# Altium PCB W040 24011506-06PBS PCB.PcbDoc (part 2 of 3)
Units mil, origin at the board's own origin, x right, y up, seen from the top; angles counter-clockwise.
Board outline 4320.55 x 590.55 mil, 4 copper layers (Top Layer, MidLayer1, MidLayer2, Bottom Layer); 218 components, 121 nets, 685 pads, 487 vias.
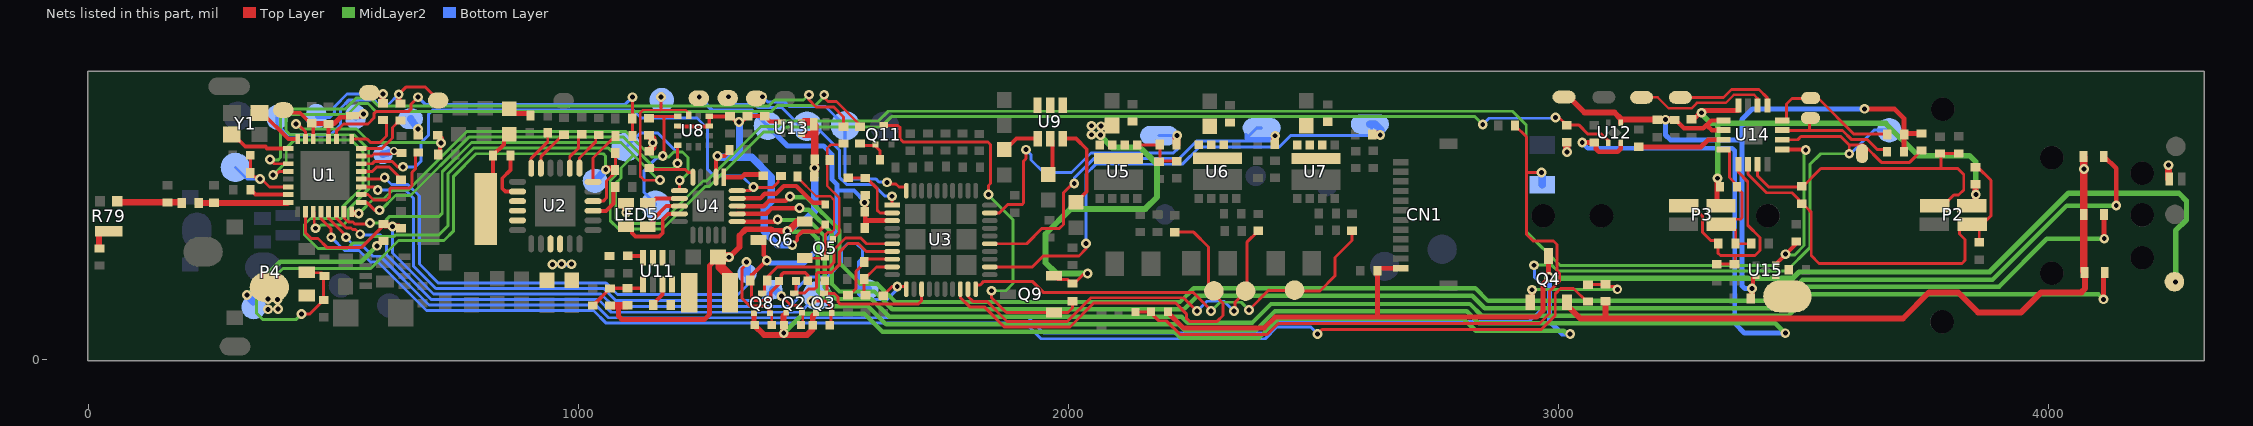
[diagram p4: the nets of this part, all layers, seen from the top]

## Via types
v1: diameter 20, hole 10, Top Layer to Bottom Layer, tented both sides, 484 vias
v2: diameter 16, hole 8, Top Layer to Bottom Layer, tented both sides, 1 vias
v3: diameter 16, hole 10, Top Layer to Bottom Layer, tented both sides, 1 vias
v4: diameter 18, hole 8, Top Layer to Bottom Layer, tented both sides, 1 vias

## Nets (pads, with @x,y where several pads share a name; then routed paths per layer and width w, separated by ;. In a path a pad name is that pad's centre, name@x,y a point inside that pad or via, vN(x,y) a via of type N, cw(c..) or ccw(c..) an arc to the next point about the centre after c; other vN are vias at no path point) (continued)
NetC33_1: C33.1 U14.3 | length 178.9
  Top Layer w10: C33.1@3164.43,435.05 3291.52,435.05 3305.9,449.43 U14.3@3337.35,449.43
NetC36_2: C36.2 P2.3 P3.3 R6.1 R11.1 U14.16 | length 1001.4
  Top Layer w10: C36.2@3271.93,490.05 3275.27,490.05 3294.02,508.8 3366.52,508.8 U14.16@3366.93,509.22 ; v1(3325.27,370.88) 3324.43,370.05 3324.43,322.55 P3.3@3332.35,314.63 ; R6.1@3330.27,353.38 3330.68,352.97 R6.1@3332.77,352.97 ; U14.16@3367.77,510.05 U14.16@3367.77,519.22
  Top Layer w12: P2.3@3844.43,314.63 3851.93,322.13 3851.93,338.38 R11.1@3851.93,358.8
  MidLayer2 w11: v1(3292.35,504.63) 3292.35,502.13 3311.52,482.97 3668.18,482.97 3734.02,417.13 3839.43,417.13 3852.35,404.22 v1(3852.35,337.97) ; v1(3325.27,370.88) 3325.27,480.47 3325.68,480.88
NetC38_1: C38.1 R75.2 | length 43
  Top Layer w10: R75.2@859.02,512.55 868.18,503.38 C38.1@898.18,503.38
NetC41_2: C41.2 C42.1 C60.1 P4.2 pad.@1034.02,365.47 R44.1 U2.4 | length 1392.2
  Top Layer w6: v1(435.27,93.8) 451.93,93.8 479.85,121.72 479.85,173.8 475.68,177.97 P4.2@445.68,177.97 ; U2.4@1030.27,324.11 1050.99,324.11 1057.77,330.88 1057.77,365.31 1075.68,383.23 1075.68,388.38 R44.1@1075.68,422.55
  Top Layer w12: v1(1056.1,388.38) 1058.6,390.88 1073.18,390.88 C60.1@1075.68,388.38
  MidLayer2 w6: v1(435.27,93.8) 424.43,82.97 355.27,82.97 343.6,94.63 343.6,133.38 397.14,186.93 576.26,186.93 633.18,243.85 725.94,243.85 745.68,263.59 745.68,375.05 791.52,420.88 1050.89,420.88 1055.47,416.3 v1@1055.47,389.01
  Bottom Layer w15: pad.@1034.02,365.47 v1(1056.1,388.38)
NetC45_2: C45.2 C46.2 pad.@300.27,392.97 U1.22 | length 184.4
  Top Layer w6: C45.2@331.1,416.72 331.1,380.88 338.18,373.8 349.02,373.8 353.6,369.22 369.6,353.21 U1.22@408.36,353.21
  Bottom Layer w6: pad.@300.27,392.97 324.02,369.22 v1(350.27,369.22)
NetC47_2: C47.2 U1.23 | length 81.4
  Top Layer w8: C47.2@331.1,347.55 341.19,337.46 U1.23@408.36,337.46
NetC48_1: C48.1 R58.2 U1.24 | length 181.4
  Top Layer w12: R58.2@225.27,320.05 U1.24@406.7,320.05
NetC49_1: C49.1 R58.1 R79.2 | length 131.2
  Top Layer w13: R79.2@58.81,324.22 61.31,321.72 R58.1@189.02,321.72
NetC50_2: C50.2 R32.2 U3.2 | length 146.1
  Top Layer w6: C50.2@1549.85,371.72 1585.27,371.72 1587.77,371.72 1610.27,349.22 1610.27,305.47 1615.6,300.14 U3.2@1640.68,300.14
NetC53_2: C53.2 R52.2 U3.8 | length 141
  Top Layer w6: C53.2@1550.68,132.13 1552.77,132.13 1566.62,145.99 1566.62,180.99 1591.28,205.65 U3.8@1640.68,205.65
NetC54_2: C54.2 R53.2 U3.9 | length 101.3
  Top Layer w6: C54.2@1586.1,132.13 1583.6,134.63 R53.2@1583.6,165.05 1608.45,189.9 U3.9@1640.68,189.9
NetC57_2: C57.2 U11.4 | length 33
  Top Layer w8: C57.2@1101.1,212.55 1128.5,212.55 U11.4@1132.46,208.59
NetC58_1: C58.1 U11.7 | length 49.6
  Top Layer w8: C58.1@1153.18,112.13 1153.18,115.05 1171.83,133.7 U11.7@1171.83,154.01
NetC58_2: C58.2 L4.1 U11.8
NetC59_1: C59.1 L1.2 R75.1 U2.15 U2.16 U2.17 | length 102.3
  Top Layer w8: L1.2@826.1,371.8 826.1,417.97 848.18,440.05 848.18,449.63 R75.1@859.02,460.47
NetC59_2: C59.2 U2.14 | length 108.2
  Top Layer w8: C59.2@861.52,417.55 861.52,387.55 844.85,370.88 844.85,350.05 851.11,343.79 U2.14@876.01,343.79
NetC61_2: C61.2 R16.2 R21.1 U5.1 | length 117
  Top Layer w6: U5.1@2141.1,438.8 2185.27,438.8 2186.93,437.13 C61.2@2186.93,406.3 ; R16.2@2221.52,405.47 2220.68,406.3 C61.2@2186.93,406.3 ; C61.2@2186.93,406.3 C61.2@2185.27,404.63 C61.2@2186.93,406.3
NetC63_1: C63.1 C65.2 P3.2 R5.2 U14.5 | length 481.6
  Top Layer w6: P3.2@3256.1,314.63 3273.18,314.63 3294.43,293.38 3294.43,260.47 3310.68,244.22 3321.93,244.22 3326.52,239.63 3326.52,217.55 3331.1,212.97 3401.52,212.97 3411.93,223.38 3411.93,250.05 3386.93,275.05 3386.93,363.8 3367.77,382.97 U14.5@3367.77,399.33 ; C65.2@3323.6,195.47 R5.2@3359.85,195.47 3360.68,196.3 3360.68,211.72
NetC63_2: C63.2 C64.1 P3.4 R6.2 U14.4 | length 301.6
  Top Layer w6: U14.4@3337.35,429.74 3345.99,429.74 3349.43,426.3 3349.43,372.13 3364.85,356.72 3364.85,351.72 3375.27,341.3 3375.27,290.47 3371.93,287.13 3342.77,287.13 P3.4@3332.77,277.13 3350.68,277.13 3362.35,265.47 3362.35,237.97 3363.18,237.13 C64.1@3393.6,237.13
NetC66_1: C66.1 P11.1 U15.3
NetC68_1: C68.1 C69.2 P2.4 R11.2 U14.6 | length 892.8
  Top Layer w6: U14.6@3387.45,399.33 3387.45,379.12 3425.27,341.3 3477.35,341.3 3490.68,327.97 3490.68,327.13 3507.77,310.05 3516.52,301.3 3516.52,212.97 3532.35,197.13 3824.02,197.13 3830.27,203.38 3830.27,245.88 3819.02,257.13 3819.02,272.13 3824.02,277.13 3866.1,277.13 3883.18,294.22 3883.18,366.72 3856.52,393.38 R11.2@3851.93,393.38 ; P2.4@3858.18,277.55 3859.43,276.3 C69.2@3859.43,240.05
NetC68_2: C68.2 C70.1 P2.2 R10.1 U14.7 | length 649
  Top Layer w6: U14.7@3407.14,399.33 3407.14,375.26 3429.64,352.76 3494.22,352.76 3494.85,352.13 3497.35,352.13 3536.1,390.88 3815.68,390.88 3827.77,378.8 3827.77,347.13 3817.04,336.4 3807.45,336.4 3785.68,314.63 P2.2@3768.18,314.63 ; 3781.1,391.3 3781.1,392.55 3781.52,392.97 3781.52,419.22 R10.1@3779.43,421.3 C70.1@3817.35,421.3
NetC72_2: C72.2 U1.5 | length 97
  Top Layer w6: U1.5@556.93,384.71 579.51,384.71 588.96,394.16 613.65,394.16 638.18,369.63 C72.2@638.18,367.97
NetL01_1: L01.1 R70.1 U3.20 | length 920.8
  Top Layer w6: U3.20@1811.17,144.63 1811.17,151.78 1812.35,152.97 1820.27,152.97 1827.77,160.47 1926.52,160.47 1948.96,138.02 2254.8,138.02 2291.52,101.3 v1(2291.52,99.63) ; v1(2369.02,102.13) 2409.43,142.55 2410.27,141.72 2461.1,141.72 2461.93,140.88 2513.6,140.88 2544.43,171.72 2544.43,209.22 2579.02,243.8 R70.1@2579.02,263.8
  MidLayer2 w6: v1(2291.52,99.63) 2309.69,117.81 2353.34,117.81 v1(2369.02,102.13)
NetL02_1: L02.1 R68.1 U3.19 | length 811.4
  Top Layer w6: U3.19@1795.42,144.63 1795.42,129.48 1805.27,119.63 1834.12,119.63 1875.16,78.59 1998.18,78.59 2046.61,127.02 2235.38,127.02 v1(2262.77,99.63) ; v1(2338.18,99.63) 2340.27,101.72 2340.27,117.97 2361.93,139.63 L02.1@2361.93,140.47 2364.43,142.97 2364.43,240.05 R68.1@2387.77,263.38
  Bottom Layer w6: v1(2262.77,99.63) 2282.97,119.84 2317.97,119.84 v1(2338.18,99.63)
NetL03_1: L03.1 R14.1 U3.18 | length 857.7
  Top Layer w6: U3.18@1779.67,144.63 1779.67,127.73 1799.02,108.38 1828.6,108.38 1869.43,67.55 2003.39,67.55 2051.86,116.02 2219.3,116.02 2241.1,94.22 2241.1,85.05 2247.35,78.8 2304.02,78.8 2316.1,90.88 2316.1,115.88 2286.52,145.47 2286.52,230.47 2256.1,260.88 R14.1@2217.35,260.88
NetLED1_2: LED1.2 U4.17 | length 3071.1
  Top Layer w9: U4.17@1324.43,298.22 1383.44,298.22 1395.27,310.05 v1(1451.52,310.05)
  Top Layer w10: v1@4114.02,247.97 LED1.2@4114.02,296.72
  MidLayer2 w9: v1(1451.52,310.05) 1455.06,306.51 1470.27,306.51 1517.77,259.01 1517.77,155.05 1533.08,139.74 1604.43,139.74 1640.79,103.38 2236.1,103.38 2263.81,131.09 2824.64,131.09 2850.27,105.47 3461.52,105.47 3505.68,149.63 3899.85,149.63 3997.35,247.13 4114.02,247.13 v1(4114.43,247.55)
NetLED2_2: LED2.2 U4.18 | length 3165
  Top Layer w9: U4.18@1324.43,313.97 1378.77,313.97 1389.43,324.63 1423.6,324.63 v1(1432.35,333.38)
  Top Layer w10: LED2.2@4113.6,415.05 4114.85,415.05 4139.02,390.88 v1(4139.02,315.05)
  MidLayer2 w9: v1(1432.35,333.38) 1434.02,331.72 1466.52,331.72 1533.18,265.05 1533.18,198.12 1576.05,155.26 1610.37,155.26 1647.25,118.38 2228.18,118.38 2256.1,146.3 2831.1,146.3 2856.93,120.47 3455.27,120.47 3498.55,163.75 3886.46,163.75 4037.77,315.05 v1(4139.02,315.05)
NetLED3_2: LED3.2 U4.16 | length 3042.6
  Top Layer w9: U4.16@1324.43,282.47 1402.69,282.47 v1(1406.93,286.72)
  Top Layer w10: v1(4112.77,123.8) 4112.77,175.47 LED3.2@4115.68,178.38
  MidLayer2 w9: v1(1406.93,286.72) 1407.97,285.68 1470.06,285.68 1502.77,252.97 1502.77,148.38 1526.67,124.48 1598.03,124.48 1634.54,87.97 2231.31,87.97 2243.6,75.68 2375.27,75.68 2413.81,114.22 2819.85,114.22 2843.81,90.26 3469.95,90.26 3513.5,133.8 4102.77,133.8 v1(4112.77,123.8)
NetLED4_2: LED4.2 U4.19 | length 206
  Top Layer w9: U4.19@1324.43,329.72 1371.19,329.72 1380.68,339.22 1403.6,339.22 1419.43,355.05 1444.85,355.05 1479.43,320.47 1501.52,320.47 LED4.2@1504.43,317.55
NetLED5_1: LED5.1 U4.8 | length 84.9
  Top Layer w8: LED5.1@1141.52,271.72 1153.18,283.38 1153.18,287.55 1179.6,313.97 U4.8@1206.44,313.97
NetLED5_2: LED5.2 U4.7 | length 68.9
  Top Layer w8: LED5.2@1141.52,320.05 1148.6,320.05 1158.27,329.72 U4.7@1206.44,329.72
NetLED5_4: LED5.4 U4.9 | length 157.8
  Top Layer w8: LED5.4@1097.35,271.72 1104.02,271.72 1109.43,266.3 1109.43,258.8 1116.41,251.82 1164.95,251.82 1172.35,259.22 1172.35,287.97 1182.61,298.22 U4.9@1206.44,298.22
NetP5_1: P5.1 pad.@465.27,497.13 R61.2 | length 211.7
  Top Layer w12: P5.1@573.6,545.05 576.1,542.55 v1(601.52,542.55) 600.68,541.72 R61.2@600.68,524.22
  Bottom Layer w6: pad.@465.27,497.13 467.35,495.05 493.18,495.05 502.77,504.63 502.77,517.13 528.18,542.55 v1(601.52,542.55)
NetP6_1: P6.1 pad.@385.27,495.47 R62.2 | length 452.4
  Top Layer w6: v1(633.6,542.13) 649.02,557.55 687.35,557.55 714.02,530.88 P6.1@714.02,529.63
  Top Layer w12: v1(633.6,542.13) 633.6,526.72 R62.2@636.93,523.38
  Bottom Layer w6: pad.@385.27,495.47 385.27,481.72 407.77,459.22 494.02,459.22 514.75,479.95 514.75,513.28 532.35,530.88 582.77,530.88 592.35,521.3 612.77,521.3 v1(633.6,542.13)
NetP9_1: P9.1 U14.14 | length 275.6
  Top Layer w5: P9.1@3170.27,535.88 3203.18,535.88 3225.68,513.38 3271.93,513.38 3283.18,524.63 3342.04,524.63 3358.7,541.3 3399.85,541.3 3407.14,534.01 U14.14@3407.14,519.22
NetP10_1: P10.1 U14.13 | length 206.9
  Top Layer w6: P10.1@3249.43,535.88 3337.45,535.88 3353.5,551.93 3409.95,551.93 3426.82,535.06 U14.13@3426.82,519.22
NetP15_1: P15.1 pad.@1466.93,477.13 U3.1 | length 468.5
  Top Layer w6: v1(1640.27,334.22) 1640.27,316.3 U3.1@1640.68,315.88
  Bottom Layer w6: v1(1306.93,537.13) 1322.56,521.51 1360.32,521.51 1366.46,515.36 1415.37,515.36 1453.6,477.13 1484.43,477.13 1532.77,428.8 1532.77,373.07 1547.77,358.07 1602.04,358.07 1625.89,334.22 v1(1640.27,334.22)
NetP16_1: P16.1 pad.@1545.27,477.97 U3.40 | length 435
  Top Layer w6: v1(1629.85,362.55) 1633.18,359.22 1648.18,359.22 1654.43,352.97 1668.6,352.97 1669.43,352.13 U3.40@1669.43,345.4
  Bottom Layer w6: v1(1375.68,537.13) 1386,526.82 1420.58,526.82 1430.27,517.13 1504.85,517.13 1544.02,477.97 1544.02,379.22 1553.6,369.63 1606.93,369.63 1613.5,363.07 1629.33,363.07 v1(1629.85,362.55)
NetQ2_3: Q2.3 R50.2 U3.7 | length 306
  Top Layer w6: R50.2@1444.43,161.3 1444.43,139.63 1441.1,136.3 1461.93,136.3 1470.27,144.63 1482.35,144.63 1486.1,148.38 1486.1,176.3 1488.03,178.23 1516.78,178.23 1532.87,194.32 1532.87,220.05 1550.37,237.55 1571.52,237.55 1587.67,221.4 U3.7@1640.68,221.4
NetQ3_3: Q3.3 R51.2 U3.13 | length 270.9
  Top Layer w6: R51.2@1503.18,161.72 1507.35,157.55 1507.35,141.3 Q3.3@1501.52,135.47 1522.77,135.47 1529.85,128.38 1529.85,118.8 1534.85,113.8 1693.6,113.8 1700.93,121.13 U3.13@1700.93,144.63
NetQ4_1: Q4.1 R3.2 R4.2 | length 263.7
  Top Layer w6: R3.2@3061.1,153.8 3096.1,153.8 3099.85,150.05 3114.85,150.05 v1(3120.68,144.22)
  Top Layer w10: Q4.1@2943.18,117.97 2946.52,121.3 v1(2946.52,143.38)
  MidLayer2 w6: v1(2946.52,143.38) v1@3119.85,143.38
NetQ5_1: Q5.1 R29.1 R31.1 | length 240.1
  Top Layer w5: Q5.1@1519.85,247.13 1532.97,260.26 1532.97,330.47 1508.18,355.26 1508.18,432.13 1514.85,438.8 R29.1@1538.6,438.8
  Top Layer w6: R31.1@1507.77,408.8 1508.6,407.97 R31.1@1513.6,407.97
NetQ5_3: Q5.3 Q6.1 R48.1 | length 269
  Top Layer w5: R48.1@1447.35,374.63 1447.35,372.55 1485.68,334.22 1514.43,334.22 1521.93,326.72 1521.93,265.47 1517.04,260.57 1508.7,260.57 1504.43,256.3 1504.43,207.97 Q6.1@1461.93,207.97
NetQ8_3: Q8.3 R49.2 U3.6 | length 346
  Top Layer w6: Q8.3@1375.27,135.47 1380.27,140.47 1380.27,163.8 1406.2,189.74 1512.04,189.74 1521.72,199.43 1521.72,225.26 1545.27,248.8 1576.52,248.8 1588.17,237.14 U3.6@1640.68,237.14
NetQ9_1: Q9.1 Q11.3 R22.1 | length 813.8
  Top Layer w6: Q11.3@1623.18,479.63 1624.43,478.38 1652.77,478.38 1656.93,474.22 1656.93,450.88 1663.18,444.63 1836.1,444.63 1841.52,439.22 1841.52,360.05 1837.35,355.88 v1(1837.35,337.97) ; v1(1843.6,141.3) 1843.6,126.82 1873.7,96.72 1999.43,96.72 2008.6,105.88 R22.1@2008.6,119.63
  MidLayer2 w6: v1(1837.35,337.97) 1837.35,336.3 1887.35,286.3 1887.35,155.88 1872.77,141.3 v1(1843.6,141.3)
NetQ11_1: Q11.1 R28.1 R30.2 | length 69.7
  Top Layer w6: R28.1@1574.85,441.72 1579.02,437.55 1604.43,437.55 Q11.1@1606.93,440.05 1606.93,435.88 1615.68,427.13 R30.2@1615.68,408.8
NetR2_2: R2.2 R12.2 R13.1 R80.1 | length 1392.6
  Top Layer w6: R12.2@2137.35,97.97 2168.6,97.97 2168.6,96.3 2184.85,80.05 2200.27,80.05 2228.6,51.72 2406,51.72 2428.5,74.22 2961.72,74.22 2982.35,94.84 2982.35,140.47 3003.18,161.3 3003.18,176.72 2997.35,182.55 2997.35,235.47 2990.27,242.55 2949.02,242.55 2935.27,256.3 2935.27,455.47 R2.2@2911.93,478.8 ; 2936.52,382.55 v1(2965.68,382.55)
  Bottom Layer w15: v1(2965.68,382.55) 2967.77,380.47 R80.1@2967.77,357.55
NetR7_1: R7.1 SDA.1 U14.12 | length 279.8
  Top Layer w6: U14.12@3457.24,488.8 3463.18,488.8 3466.1,491.72 3466.1,522.13 3477.35,533.38 3514.02,533.38 3531.1,533.38 3603.6,460.88 R7.1@3670.68,460.88
NetR8_1: R8.1 SCL.1 U14.11 | length 255.5
  Top Layer w6: U14.11@3457.97,468.38 3580.27,468.38 3599.07,449.58 3631.1,449.58 3651.46,429.22 3666.93,429.22 R8.1@3671.1,425.05 ; 3513.18,470.05 3513.18,492.13 SCL.1@3514.85,493.8
NetR19_2: pad.@2615.68,481.3 R19.2 U3.22 | length 1058.1
  Top Layer w6: U3.22@1839.92,189.9 1926.78,189.9 1949.02,212.13 2021.83,212.13 2036.52,226.82 v1(2036.52,237.97)
  Top Layer w16: R19.2@2620.68,460.05 2636.1,460.05 v1(2636.93,459.22)
  Bottom Layer w6: v1(2036.52,237.97) 2036.52,379.63 2056.31,399.43 2232.56,399.43 2267.77,434.63 2430.68,434.63 2454.02,457.97 2619.43,457.97 2619.43,477.55 pad.@2615.68,481.3
  Bottom Layer w15: pad.@2615.68,481.3 2626.52,481.3 2638.18,469.63 v1@2638.18,460.47
NetR20_2: pad.@2394.85,473.8 R20.2 U3.25 | length 846
  Top Layer w6: U3.25@1839.92,237.14 1915.28,237.14 1946.72,268.59 1982.14,268.59 1990.27,276.72 1990.27,341.3 2009.02,360.05 v1(2012.35,360.05)
  Top Layer w16: R20.2@2421.52,440.47 v1@2421.52,456.72
  Bottom Layer w6: v1(2012.35,360.05) 2012.35,371.3 2051.93,410.88 2226.1,410.88 2262.35,447.13 2411.93,447.13 v1(2422.35,457.55) 2416.93,452.13 2362.97,452.13 2362.77,452.34 2362.77,460.68 2367.35,456.09 2385.06,473.8 pad.@2394.85,473.8
NetR21_2: pad.@2185.68,457.97 R21.2 U3.29 | length 624.4
  Top Layer w6: U3.29@1839.92,300.14 1859.21,300.14 1876.62,317.55 1906.2,317.55 1908.91,320.26 1908.91,405.78 1914.02,410.88 v1(1914.02,429.22)
  Top Layer w16: R21.2@2221.1,440.05 v1@2221.1,456.72
  Bottom Layer w6: v1(1914.02,429.22) 1914.02,429.01 1924.02,419.01 1924.02,408.38 1949.85,382.55 2006.93,382.55 2046.52,422.13 2214.43,422.13 2223.6,431.3 2223.6,456.72 v1(2222.35,457.97) pad.@2185.68,457.97
NetR33_1: R33.1 R34.2 R35.2 U11.5 | length 125.2
  Top Layer w8: R33.1@1029.43,111.3 1030.27,111.3 1065.27,146.3 1132.35,146.3 1132.46,146.41 U11.5@1132.46,154.01
NetR36_2: R36.2 U2.12 | length 86.4
  Top Layer w6: U2.12@903.92,391.39 903.92,411.62 937.77,445.47 R36.2@937.77,463.8
NetR37_1: R37.1 U2.11 | length 89.4
  Top Layer w6: U2.11@923.61,391.39 923.61,414.64 968.6,459.63 R37.1@971.1,459.63
NetR38_1: R38.1 U2.8 | length 79.1
  Top Layer w6: U2.8@982.67,391.39 982.67,414.53 1000.27,432.13 1000.27,453.8 R38.1@1006.93,460.47
NetR39_1: R39.1 U2.7 | length 84.2
  Top Layer w6: U2.7@1002.35,391.39 1002.35,412.13 1035.68,445.47 1035.68,452.97 R39.1@1041.93,459.22
NetR43_1: R43.1 U2.6 | length 112.3
  Top Layer w6: U2.6@1030.27,363.48 1030.27,412.13 R43.1@1075.27,457.13
NetR45_1: R45.1 U2.3 | length 82.9
  Top Layer w8: U2.3@1030.27,304.42 1056.72,304.42 1071.52,319.22 1071.52,348.8 R45.1@1075.68,352.97
NetR46_1: R46.1 U4.1 | length 83.5
  Top Layer w10: U4.1@1296.93,372.97 1333.6,372.97 1339.02,378.38 1375.27,378.38 R46.1@1377.35,376.3
NetR57_2: R57.2 R79.1 | length 52.5
  Top Layer w13: R57.2@21.93,228.38 21.93,260.05 24.85,262.97 R79.1@41.52,262.97
NetR61_1: R61.1 U1.9 | length 115.2
  Top Layer w6: U1.9@537.77,451.12 569.2,451.12 576.52,443.8 595.27,443.8 608.6,457.13 608.6,481.72 R61.1@600.68,489.63
NetR62_1: R62.1 U1.8 | length 116.2
  Top Layer w6: U1.8@556.93,431.95 599.67,431.95 620.68,452.97 620.68,474.63 634.85,488.8 R62.1@636.93,488.8
NetR63_1: pad.@601.1,419.63 R63.1 U1.7 | length 112.6
  Top Layer w6: U1.7@556.93,416.2 578.92,416.2 583.29,420.57 617.87,420.57 v3(624.02,426.72)
  Top Layer w12: v3(624.02,426.72) 626.52,424.22 637.77,424.22 R63.1@639.43,422.55
  Bottom Layer w15: pad.@601.1,419.63 v3(624.02,426.72)
NetR64_1: R64.1 U1.2 | length 202.5
  Top Layer w6: U1.2@556.93,337.46 570.77,337.46 581.93,326.3 600.68,326.3 608.6,326.3 615.27,332.97 615.27,348.8 617.77,351.3 655.68,351.3 660.68,356.3 660.68,382.97 667.35,389.63 667.35,417.13 R64.1@673.6,423.38
NetR64_2: pad.@657.77,492.13 R64.2 | length 39.4
  Top Layer w12: v1(673.18,471.3) 673.6,470.88 R64.2@673.6,457.97
  Bottom Layer w15: pad.@657.77,492.13 v1(673.18,471.3)
NetR71_2: R71.2 U9.6 | length 175.3
  Top Layer w8: U9.6@1988.95,451.72 2016.1,451.72 2037.77,430.05 2037.77,343.8 R71.2@2015.68,321.72
NetR72_2: R72.2 U9.5 | length 79
  Top Layer w8: R72.2@1959.43,378.38 1968.18,387.13 1968.18,446.89 U9.5@1963.36,451.72
NetR73_2: R73.2 U9.4 | length 77.5
  Top Layer w8: R73.2@1869.43,429.63 1871.93,429.63 1894.02,451.72 U9.4@1937.77,451.72
NetU1_16: U1.16 Y1.4 | length 99.7
  Top Layer w8: Y1.4@349.43,503.38 356.1,503.38 408.36,451.12 U1.16@427.53,451.12
NetU1_17: U1.17 Y1.2 | length 126.9
  Top Layer w8: Y1.2@292.77,459.22 296.52,459.22 320.37,435.36 361.62,435.36 365.03,431.95 U1.17@408.36,431.95
U1-1: pad.@1097.77,434.63 R41.1 U1.1 U4.5 U8.4 | length 1043.7
  Top Layer w6: U1.1@556.93,321.72 568.18,321.72 584.43,305.47 v1(594.02,305.47) ; R41.1@1144.02,391.72 1147.35,388.38 1218.6,388.38 1224.43,382.55 1235.27,382.55 1233.94,381.22 U4.5@1233.94,372.97 ; v1(1202.77,401.3) U8.4@1202.77,438.08
  MidLayer2 w6: v1(594.02,305.47) 596.72,305.47 627.14,335.88 657.77,335.88 776.62,454.74 1092.25,454.74 1155.89,391.09 1195.06,391.09 1202.77,398.8 v1(1202.77,401.3)
  Bottom Layer w6: pad.@1097.77,434.63 1126.52,463.38 1162.35,463.38 1202.77,422.97 v1(1202.77,401.3)
U1-3: pad.@1396.93,143.38 Q2.2 R55.2 U1.3 | length 1137.9
  Top Layer w6: U1.3@556.93,353.21 584.19,353.21 v1(590.68,346.72) ; v1(1414.43,130.47) 1434.02,110.88 1450.68,110.88 1454.02,107.55 1454.02,102.13 1458.18,97.97 1458.18,75.05 R55.2@1454.43,71.3
  Bottom Layer w6: v1(590.68,346.72) 646.93,346.72 664.02,329.63 664.02,190.88 709.22,145.68 1052.14,145.68 1076.52,121.3 1373.18,121.3 1395.27,143.38 pad.@1396.93,143.38
  Bottom Layer w16: pad.@1396.93,143.38 1401.52,143.38 v1(1414.43,130.47)
U1-4: pad.@1344.43,176.72 Q8.2 R54.2 U1.4 | length 1198.8
  Top Layer w6: U1.4@556.93,368.96 601.68,368.96 v1(604.85,372.13) ; v1(1343.18,200.05) 1343.18,195.05 1334.43,186.3 1334.43,125.88 1350.48,109.84 1381.73,109.84 1391.1,100.47 1391.1,95.88 1394.85,92.13 R54.2@1394.85,71.3
  Bottom Layer w6: v1(604.85,372.13) 618.6,358.38 651.93,358.38 675.68,334.63 675.68,195.78 714.75,156.72 1056.93,156.72 1079.85,133.8 1326.1,133.8 1344.43,152.13 pad.@1344.43,176.72
  Bottom Layer w16: pad.@1344.43,176.72 v1@1344.43,198.8
U1-6: R47.1 U1.6 U4.20 | length 1124.9
  Top Layer w6: U1.6@556.93,400.46 579.42,400.46 584.43,405.47 619.85,405.47 631.1,394.22 v1(642.35,394.22) ; U4.20@1324.43,345.47 1350.27,345.47 v1(1357.77,352.97) 1359.02,351.72 1396.93,351.72 1408.18,362.97 1408.18,372.13 1410.27,372.13 R47.1@1413.6,375.47
  Bottom Layer w6: v1(642.35,394.22) 667.77,394.22 679.43,405.88 679.43,443.8 694.02,458.38 694.02,500.88 702.77,509.63 703.6,510.47 1111.52,510.47 1128.18,493.8 1242.35,493.8 1263.6,472.55 1263.6,389.22 1277.77,375.05 1334.43,375.05 1356.52,352.97 v1(1357.77,352.97)
U1-11: R42.2 R43.2 U1.11 | length 751
  Top Layer w6: U1.11@506.27,451.12 506.27,466.89 521.1,481.72 570.79,481.72 582.77,493.7 582.77,502.55 586.93,506.72 653.18,506.72 658.18,511.72 658.18,521.3 v1(673.18,536.3) ; R43.2@1110.68,457.13 v1(1110.68,536.3)
  Bottom Layer w6: v1(673.18,536.3) 687.77,521.72 1096.1,521.72 v1(1110.68,536.3)
U1-15: R65.1 R66.1 U1.15 | length 397.2
  Top Layer w6: v1(423.6,481.72) 427.35,481.72 443.28,465.79 U1.15@443.28,451.12
  Top Layer w8: R66.1@714.43,419.22 717.77,422.55 717.77,440.88 v1(719.85,442.97)
  Top Layer w12: R65.1@713.18,458.8 719.85,452.13 v1(719.85,442.97)
  MidLayer2 w6: v1(423.6,481.72) 434.02,471.3 547.35,471.3 574.95,443.7 717.87,443.7 v1@719.02,442.55
U1-19: R29.2 U1.19 | length 1376.5
  Top Layer w6: v1(370.68,409.22) 379.44,400.46 U1.19@408.36,400.46 ; v1(1470.68,541.3) 1470.68,530.88 1485.47,516.09 1521.52,516.09 1541.52,496.09 R29.2@1541.52,476.3
  MidLayer2 w6: v1(370.68,409.22) 372.14,407.76 386.72,407.76 392.04,413.07 392.04,499.11 404.85,511.93 523.81,511.93 546.1,534.22 575.68,534.22 591.83,518.07 1388.7,518.07 1401.1,530.47 1459.85,530.47 v1(1470.68,541.3)
U1-20: R1.2 U1.20 U12.3 | length 3641.1
  Top Layer w6: v1(377.35,377.55) 382.35,377.55 389.51,384.71 U1.20@408.36,384.71 ; v1(2994.43,494.63) 3001.93,494.63 R1.2@3017.35,479.22 3042.77,479.22 3061.1,460.88 3088.6,460.88 3102.18,447.31 U12.3@3102.18,443.59
  MidLayer2 w6: v1(377.35,377.55) 404.02,404.22 404.02,432.13 420.48,448.59 536.93,448.59 560.68,424.84 560.68,354.22 519.22,312.76 519.22,291.51 516.31,288.59 453.39,288.59 441.2,276.4 441.2,254.95 468.6,227.55 529.02,227.55 539.8,238.33 565.84,238.33 579.75,252.24 624.33,252.24 627.56,255.47 715.47,255.47 734.43,274.43 734.43,380.47 786.2,432.24 1062.04,432.24 1075.68,418.59 1075.68,376.72 1065.27,366.3 1065.27,284.32 1082.45,267.13 1172.14,267.13 1258.6,353.59 1266.93,353.59 1378.6,465.26 1414.23,465.26 1424.85,475.88 1618.18,475.88 1638.91,496.61 2829.95,496.61 v1(2846.1,480.47)
  Bottom Layer w6: v1(2846.1,480.47) 2859.02,493.38 2993.18,493.38 v1(2994.43,494.63)
U1-26: C55.2 pad.@1591.93,143.8 R59.2 R60.1 U1.26 U3.11 | length 1692.4
  Top Layer w6: U1.26@443.28,302.55 443.28,259.54 454.85,247.97 469.02,247.97 487.77,229.22 556.93,229.22 602.77,275.05 R59.2@602.77,277.55 ; C55.2@1622.35,131.3 1622.35,131.72 1640.68,150.05 1666.93,150.05 1669.43,152.55 U3.11@1669.43,144.63
  Top Layer w12: R59.2@602.77,277.55 606.1,274.22 619.02,274.22 v1(620.68,272.55) 634.43,272.55 R60.1@638.18,268.8
  Bottom Layer w6: v1(620.68,272.55) 620.68,218.38 704.54,134.53 1046.62,134.53 1072.35,108.8 1430.68,108.8 1446.93,125.05 1446.93,147.13 1469.1,169.3 1503.09,169.3 1503.38,169.01 1508.39,169.01 1537.35,197.97 1537.35,225.05 1549.43,237.13 1568.6,237.13 1579.85,225.88 1579.85,208.38 1572.35,200.88 1572.35,133.8 1582.35,123.8 1630.68,123.8 1651.1,144.22 v1(1651.1,150.05)
  Bottom Layer w16: pad.@1577.77,142.13 1579.43,143.8 pad.@1591.93,143.8
U1-27: R28.2 U1.27 | length 1721.3
  Top Layer w6: U1.27@459.03,302.55 461.1,300.48 461.1,271.3 v1(463.6,268.8) ; v1(1501.93,541.3) 1501.93,535.47 1509.85,527.55 1526.93,527.55 1574.85,479.63 R28.2@1574.85,476.3
  MidLayer2 w6: v1(463.6,268.8) 468.39,268.8 474.64,275.05 519.85,275.05 530.47,285.67 530.47,307.34 572.35,349.22 572.35,429.74 542.45,459.63 411.52,459.63 403.39,467.76 403.39,494.63 409.64,500.88 529.02,500.88 551.31,523.18 570.68,523.18 587.04,506.82 1393.5,506.82 1406.1,519.43 1483.81,519.43 1501.93,537.55 v1(1501.93,541.3)
U1-28: R3.1 U1.28 | length 2803.3
  Top Layer w6: U1.28@474.77,302.55 474.77,288.04 495.68,267.13 v1(495.68,250.47) ; v1(2509.02,52.97) 2518.6,62.55 2966.1,62.55 2994.02,90.47 2994.02,135.05 3004.85,145.88 3031.52,145.88 3058.18,119.22 R3.1@3061.1,119.22
  Bottom Layer w6: v1(495.68,250.47) 522.77,223.38 552.35,223.38 575.68,200.05 591.31,200.05 690.47,100.88 1031.1,100.88 1056.93,75.05 1912.77,75.05 1944.54,43.28 2402.25,43.28 2426,67.03 2494.95,67.03 v1(2509.02,52.97)
U1-29: LNT.1 pad.@3675.68,469.01 R9.1 U1.29 U14.10 | length 4008.7
  Top Layer w6: U1.29@490.52,302.55 490.52,288.75 525.68,253.59 v1(525.68,250.47) ; U14.10@3457.24,449.43 3488.81,449.43 3495.27,455.88 3576.93,455.88 3593.18,439.63 ; v1(3594.02,420.88) 3594.02,438.8 3593.65,438.44 3623.91,438.44 3624.64,437.71 3625.11,437.71 3659.43,403.38 3717.35,403.38 R9.1@3741.52,427.55 ; LNT.1@3620.27,421.3 3620.27,436.72 LNT.1@3621.99,438.44
  MidLayer2 w6: v1(2950.68,193.38) 2986.93,193.38 2999.02,181.3 3466.1,181.3 3513.6,228.8 3513.6,398.8 3535.68,420.88 v1(3594.02,420.88)
  Bottom Layer w6: v1(525.68,250.47) 541.52,234.63 558.18,234.63 581.1,211.72 595.68,211.72 695.37,112.03 1035.84,112.03 1061.67,86.2 1918.7,86.2 1949.85,55.05 2398.18,55.05 2421.93,78.8 2941.1,78.8 2968.18,105.88 2968.18,152.55 2951.93,168.8 2951.93,192.13 v1(2950.68,193.38) ; v1(3594.02,420.88) 3596.52,420.88 3644.64,469.01 pad.@3675.68,469.01
U1-30: pad.@1487.35,131.3 Q3.2 R56.2 U1.30 | length 1173.7
  Top Layer w6: U1.30@506.27,302.55 506.27,289.46 526.52,269.22 536.1,269.22 539.02,266.3 545.27,266.3 v1(554.85,256.72) ; v1(1476.1,120.47) 1504.85,120.47 1517.35,107.97 Q3.2@1517.35,95.88 1515.68,94.22 1515.68,73.38 R56.2@1513.18,70.88
  Bottom Layer w6: v1(554.85,256.72) 556.52,255.05 596.1,255.05 608.91,242.24 608.91,214.32 699.9,123.33 1041.15,123.33 1067.14,97.34 1452.98,97.34 v1(1476.1,120.47)
U1-31: C67.1 pad.@1170.27,530.47 U1.31 U8.12 U14.9 U15.4 | length 4367.9
  Top Layer w5: v1(1166.52,367.13) 1134.02,367.13 1126.93,374.22 1126.93,505.05 1132.04,510.15 1219.33,510.15 1224.43,505.05 U8.12@1224.43,500.16
  Top Layer w6: U1.31@522.02,302.55 522.02,289.96 530.68,281.3 540.27,281.3 544.02,277.55 572.77,277.55 v1(574.85,279.63) ; 1167.77,510.05 1168.6,510.88 v1(1168.6,536.72)
  Top Layer w8: U15.4@3444.85,195.47 3485.68,236.3 C67.1@3485.68,241.72 ; U14.9@3457.24,429.74 v1@3504.32,429.74
  MidLayer2 w6: v1(574.85,279.63) 601.31,279.63 614.12,292.45 715.37,292.45 722.35,299.43 722.35,384.22 781.83,443.7 1087.45,443.7 1164.02,367.13 v1@1165.48,367.13 ; 1112.35,417.13 1087.14,391.92 1087.14,371.2 1076.52,360.57 1076.52,289.63 1087.77,278.38 1167.77,278.38 1254.85,365.47 1262.35,365.47 1373.18,476.3 1408.6,476.3 1419.85,487.55 1612.35,487.55 1632.45,507.65 2906.83,507.65 2934.85,479.63 2934.85,261.72 3004.02,192.55 3441.93,192.55 3463.6,214.22 3482.77,214.22 3501.93,233.38 3501.93,425.47 v1(3505.27,428.8)
  other v1: 3464.02,215.88
U1-32: pad.@1157.35,315.88 R40.2 U1.32 U4.6 U8.1 | length 1130.9
  Top Layer w6: R40.2@1144.43,493.38 1147.77,496.72 U8.1@1202.77,496.72 ; v1(1172.35,416.3) 1174.85,418.8 1174.85,495.88 ; U4.6@1206.93,345.96 v1(1206.93,366.3)
  Top Layer w12: U1.32@539.07,301.25 541.1,299.22 v1(551.93,299.22)
  MidLayer2 w6: v1@552.77,299.22 581.83,328.28 602.66,328.28 621.52,347.13 652.87,347.13 771.62,465.88 1097.56,465.88 1149.43,414.01 1184.64,414.01 1195.06,424.43 1212.77,424.43 1223.96,413.23 1223.96,381.04 1209.22,366.3 v1(1206.93,366.3)
  Bottom Layer w6: pad.@1157.35,315.88 1157.35,319.22 1134.43,342.13 1134.43,386.72 1160.27,412.55 1168.6,412.55 v1(1172.35,416.3)
VC1: C3.1 C4.1 C5.1 C9.2 C10.2 C13.1 C14.1 C56.2 C71.1 CN2.1 P4.3 pad.@337.77,107.97 Q9.2 R22.2 R59.1 U2.21 U2.22 U5.2 U5.3 U5.4 U5.9 U6.2 U6.3 U6.4 U6.9 U7.2 U7.3 U7.4 U7.9 U9.1 U9.2 U9.3 U11.2 U11.3 | length 1162.1
  Top Layer w6: Q9.2@1971.1,171.72 1978.18,164.63 1998.18,164.63 2008.6,154.22 2010.27,154.22 2032.77,176.72 v1@2039.02,176.72
  Top Layer w12: v1(589.43,232.97) 599.43,242.97 R59.1@602.77,242.97
  MidLayer2 w9: v1(323.6,132.55) 324.02,132.55 391.93,200.47 556.93,200.47 v1(589.43,232.97)
  MidLayer2 w12: v1(2039.64,176.72) 1975.27,176.72 1953.6,198.38 1953.6,257.13 2004.85,308.38 2157.35,308.38 2181.52,332.55 2181.52,399.22 2146.93,433.8 2102.35,433.8 2089.45,433.8 2065.68,457.57 v1(2065.68,459.22)
  Bottom Layer w8: v1(947.35,195.05) v1@985.68,195.05 ; v1(2047.35,459.63) 2047.77,460.05 v1(2047.77,477.97) 2066.1,477.97 2065.68,477.55 v1(2065.68,459.22) 2065.27,459.63 v1(2047.35,459.63)
  Bottom Layer w15: v1(323.6,132.55) pad.@336.52,118.8
  other v1: 366.52,103.38 387.35,103.8 386.1,123.38 366.52,124.22 986.1,195.47 966.1,195.88 2066.93,477.13
VC2: C11.2 C19.2 C32.1 L4.2 Q6.2 R34.1 R35.1 R48.2 R77.1 U12.4 U13.3 U13.4 | length 4093.4
  Top Layer w10: 1081.93,108.38 1081.93,89.63 1088.6,82.97 1257.77,82.97 1268.18,93.38 1268.18,192.9 C11.2@1285.33,210.05 ; v1(3049.02,443.8) 3077.35,443.8 3077.35,430.47 3082.77,425.05 3121.52,425.05 3127.77,431.3 U12.4@3127.77,443.59
  Top Layer w12: v1@1307.35,210.05 1308.6,210.05 1329.02,230.47 1329.02,254.22 1341.52,266.72 1393.6,266.72 1397.35,262.97 v1(1426.52,262.97)
  Top Layer w15: R34.1@1064.85,111.3 1065.68,110.47 R35.1@1099.02,110.47 ; v1(1426.52,262.97) 1428.18,262.97 1447.77,282.55 Q6.2@1461.93,282.55 ; U13.3@1461,460.29 1476.34,460.29 1479.43,463.38 ; U13.4@1461,485.88 1475.27,485.88 1482.35,478.8 1482.35,375.05 R48.2@1481.93,374.63
  Top Layer w20: v1@1307.35,210.05 C11.2@1285.33,210.05 1290.27,205.12 1290.27,189.63 1309.85,170.05 L4.2@1309.85,137.13
  MidLayer2 w9: v1@1427.77,261.72 1473.81,261.72 1488.6,246.92 1488.6,141.3 1520.68,109.22 1592.04,109.22 1628.7,72.55 2225.06,72.55 2237.35,60.26 2382.97,60.26 2421.93,99.22 2813.6,99.22 2837.77,75.05 3443.18,75.05 v1(3463.6,54.63)
  Bottom Layer w10: v1(3049.02,443.8) 3060.68,432.13 3355.27,432.13 3360.27,427.13 3360.27,74.63 3380.27,54.63 v1(3463.6,54.63)
  Bottom Layer w15: v1(1426.52,262.97) 1429.85,262.97 1450.68,283.8 1461.93,283.8 1482.77,304.63 1482.77,391.3 v1(1482.35,391.72)
  other v1: 1307.77,209.63
VC3: C15.2 C16.2 C17.2 C18.1 C43.1 C44.1 LED1.1 LED2.1 LED3.1 LED4.1 LED5.3 P18.1 pad.@545.27,496.3 Q4.2 R1.1 R4.1 R40.1 R41.2 R76.1 R78.1 U1.12 U1.14 U4.2 U8.2 U8.9 U8.10 U13.1 | length 2596.8
  Top Layer w8: P18.1@398.18,510.05 403.6,504.63 432.35,504.63 454.02,482.97 C44.1@456.1,482.97 459.03,480.04 U1.14@459.03,451.12 ; U1.12@490.52,451.12 C43.1@490.52,481.46 ; U8.2@1202.35,477.87 1203.5,476.72 1265.05,476.72 1267.35,479.01 1267.35,496.4 1267.04,496.72 1309.02,496.72 C17.2@1309.85,497.55 1311.52,497.55 1323.18,485.88 1333.6,485.88 C16.2@1345.27,497.55 1380.27,497.55 1391.52,486.3 U13.1@1414.85,486.3 ; U4.2@1281.19,372.97 1281.19,413.05 v1(1284.43,416.3) 1299.02,416.3 1308.6,425.88 C18.1@1308.6,428.8 ; v1(1436.93,234.63) 1446.93,244.63 1446.93,251.72 1457.77,262.55 1490.68,262.55 LED4.1@1504.43,276.3
  Top Layer w10: C44.1@456.1,482.97 456.52,482.55 501.72,482.55 514.64,495.47 R78.1@533.39,495.47
  Top Layer w12: R78.1@536.72,498.8 559.43,498.8 v1@563.18,502.55 ; Q4.2@3017.77,117.97 3017.77,112.13 3045.27,84.63 3703.6,84.63 3756.52,137.55 3816.52,137.55 3856.93,97.13 3944.85,97.13 3985.68,137.97 4067.77,137.97 4075.27,145.47 4075.27,177.55 LED3.1@4072.35,180.47 ; 3095.27,85.47 3096.52,86.72 R4.1@3096.52,119.63
  Top Layer w15: R41.2@1144.02,426.3 1151.93,434.22 1151.93,451.3 R40.1@1144.43,458.8 ; R1.1@3017.35,444.63 3017.35,425.47 v1(3018.18,424.63) ; LED3.1@4072.35,180.47 LED2.1@4072.35,415.05 ; R76.1@4245.68,369.22 v1(4245.68,397.55)
  Top Layer w16: v1@1097.35,301.3 LED5.3@1097.35,320.05
  Bottom Layer w15: pad.@545.27,496.3 v1(561.93,501.72) ; v1(1284.43,416.3) 1287.35,413.38 1354.02,413.38 1394.02,373.38 1394.02,323.8 1379.85,309.63 1379.85,262.13 1407.35,234.63 v1(1436.93,234.63) ; v1(1327.77,485.88) 1329.02,484.63 1329.02,420.05
  other v1: 1097.77,300.88 4073.18,389.63 1151.93,443.38
VC4: C34.2 C35.2 C37.2 P7.1 R7.2 R8.2 R9.2 U12.1 U14.1 U14.2 U15.2 | length 1456.3
  Top Layer w8: v1@3397.77,148.38 3397.77,167.13 3400.51,169.88 U15.2@3403.6,169.88
  Top Layer w9: C35.2@3239.85,489.63 3256.73,472.76 3296.31,472.76 3312.35,488.8 U14.1@3337.35,488.8 ; 3305.27,477.13 3313.28,469.12 U14.2@3337.35,469.12
  Top Layer w10: v1(3625.27,512.55) 3686.1,512.55 3705.68,492.97 R8.2@3705.68,425.05 ; R7.2@3706.1,460.05 3708.18,462.13 R9.2@3741.52,462.13
  Top Layer w12: P7.1@3011.93,536.72 3021.93,536.72 3053.6,505.05 3114.85,505.05 3127.77,492.13 ; U12.1@3127.77,483.8 3127.77,492.13 ; C35.2@3237.77,489.63 3236.93,490.47 3129.43,490.47 3127.77,492.13 ; C37.2@3393.18,125.47 3393.18,132.13 3395.68,134.63 3395.68,146.3 v1@3397.77,148.38
  Bottom Layer w10: v1(3219.02,490.47) 3219.02,459.22 3229.43,448.8 3375.27,448.8 ; v1(3395.27,145.88) 3380.68,145.88 3375.27,151.3 3375.27,491.3 3396.52,512.55 v1(3625.27,512.55)
VC5: C51.2 C52.2 P14.1 pad.@1386.93,477.97 Q6.3 R32.1 R49.1 R50.1 R51.1 U3.3 | length 1147.6
  Top Layer w7: R49.1@1353.6,158.38 1353.6,129.22 1361.41,121.4 1389.12,121.4 1392.77,125.05 1392.77,138.18 1409.85,155.26 1409.85,161.3 1414.02,165.47 1414.02,173.38 1418.81,178.18 1463.39,178.18 1468.6,172.97 R51.1@1468.6,161.72
  Top Layer w9: R49.1@1353.6,158.38 1353.6,172.55 1384.02,202.97 1384.02,208.38 1378.18,214.22 1378.18,234.63 Q6.3@1367.77,245.05
  Top Layer w10: C52.2@1583.18,268.38 1585.68,270.88 R32.1@1585.68,336.72 ; 1586.1,284.63 1586.35,284.39 U3.3@1640.68,284.39
  Bottom Layer w8: v1(1246.93,536.3) 1273.91,509.32 1354.33,509.32 pad.@1385.68,477.97 ; 1529.43,344.63 1530.68,345.88 1562.35,345.88 1584.43,323.8 v1(1584.43,321.72)
  Bottom Layer w10: v1(1384.85,202.97) 1389.85,197.97 1460.68,197.97 1527.77,265.05 1527.77,358.38 1518.18,367.97 1518.18,419.22 1500.68,436.72 1426.93,436.72 pad.@1385.68,477.97
VC6: C62.2 CN1.1 pad.@4257.77,159.63 Q2.1 Q3.1 Q4.3 Q8.1 R13.2 R54.1 R55.1 R56.1 | length 4655.3
  Top Layer w10: Q8.1@1359.02,95.88 1359.02,72.55 R54.1@1360.27,71.3 ; R13.2@2203.6,96.72 2234.85,65.47 2400.27,65.47 2422.35,87.55 2956.1,87.55 2968.6,100.05 2968.6,154.22 2980.27,165.88 Q4.3@2980.27,212.13 ; 2630.68,90.05 2631.1,90.47 C62.2@2631.1,182.13 2636.23,187.26 CN1.1@2678.6,187.26
  Top Layer w12: R54.1@1360.27,70.05 1379.02,51.3 1467.35,51.3 1478.6,62.55 1478.6,89.22 Q3.1@1485.27,95.88 ; v1(1419.43,54.63) 1419.02,55.05 1419.02,90.88 Q2.1@1424.43,96.3
  MidLayer2 w9: v1(1419.43,54.63) 1459.02,94.22 1584.23,94.22 1620.89,57.55 2216.93,57.55 2229.43,45.05 2389.54,45.05 2428.7,84.22 2806.93,84.22 2831.62,59.53 3011.31,59.53 3017.87,52.97 v1(3024.43,52.97)
  MidLayer2 w11: v1@2982.35,168.38 2983.91,166.82 3479.12,166.82 3491.93,179.63 3880.68,179.63 4041.52,340.47 4266.52,340.47 4282.35,324.63 4282.35,285.88 4260.27,263.8 v1(4260.27,159.22)
  Bottom Layer w10: v1(2981.52,169.22) 2982.35,168.38 2982.35,78.8 3008.18,52.97 v1(3024.43,52.97)
pads on no net: P19.0 P19.1 P19.2 P19.3 P19.4 P19.5 U1.10 U1.13 U1.18 U1.21 U1.25 U2.1 U2.2 U2.5 U2.9 U2.10 U2.23 U2.24 U3.4 U3.5 U3.10 U3.12 U3.14 U3.15 U3.33 U3.34 U3.37 U3.39 U4.10 U4.11 U4.12 U4.14 U4.15 U8.3 U8.5 U8.7 U8.11 U10.6 U11.6 U14.8 U14.15 U15.0
copper on no net: | length 88.7
  Top Layer w5: 2998.6,251.09 2998.6,249.22 3002.14,245.68
  Top Layer w6: 522.02,451.12 522.02,462.43 530.16,470.57 563.5,470.57 567.56,466.51 584.22,466.51 v1(586.52,464.22)
  other v1: 4260.27,297.97